# Altium PCB ErrorPCB.PcbDoc
Units mm, origin at the board's own origin, x right, y up, seen from the top; angles counter-clockwise.
Board outline 133.2 x 134 mm, 2 copper layers (Top Layer, Bottom Layer); 69 components, 47 nets, 197 pads, 4 vias.
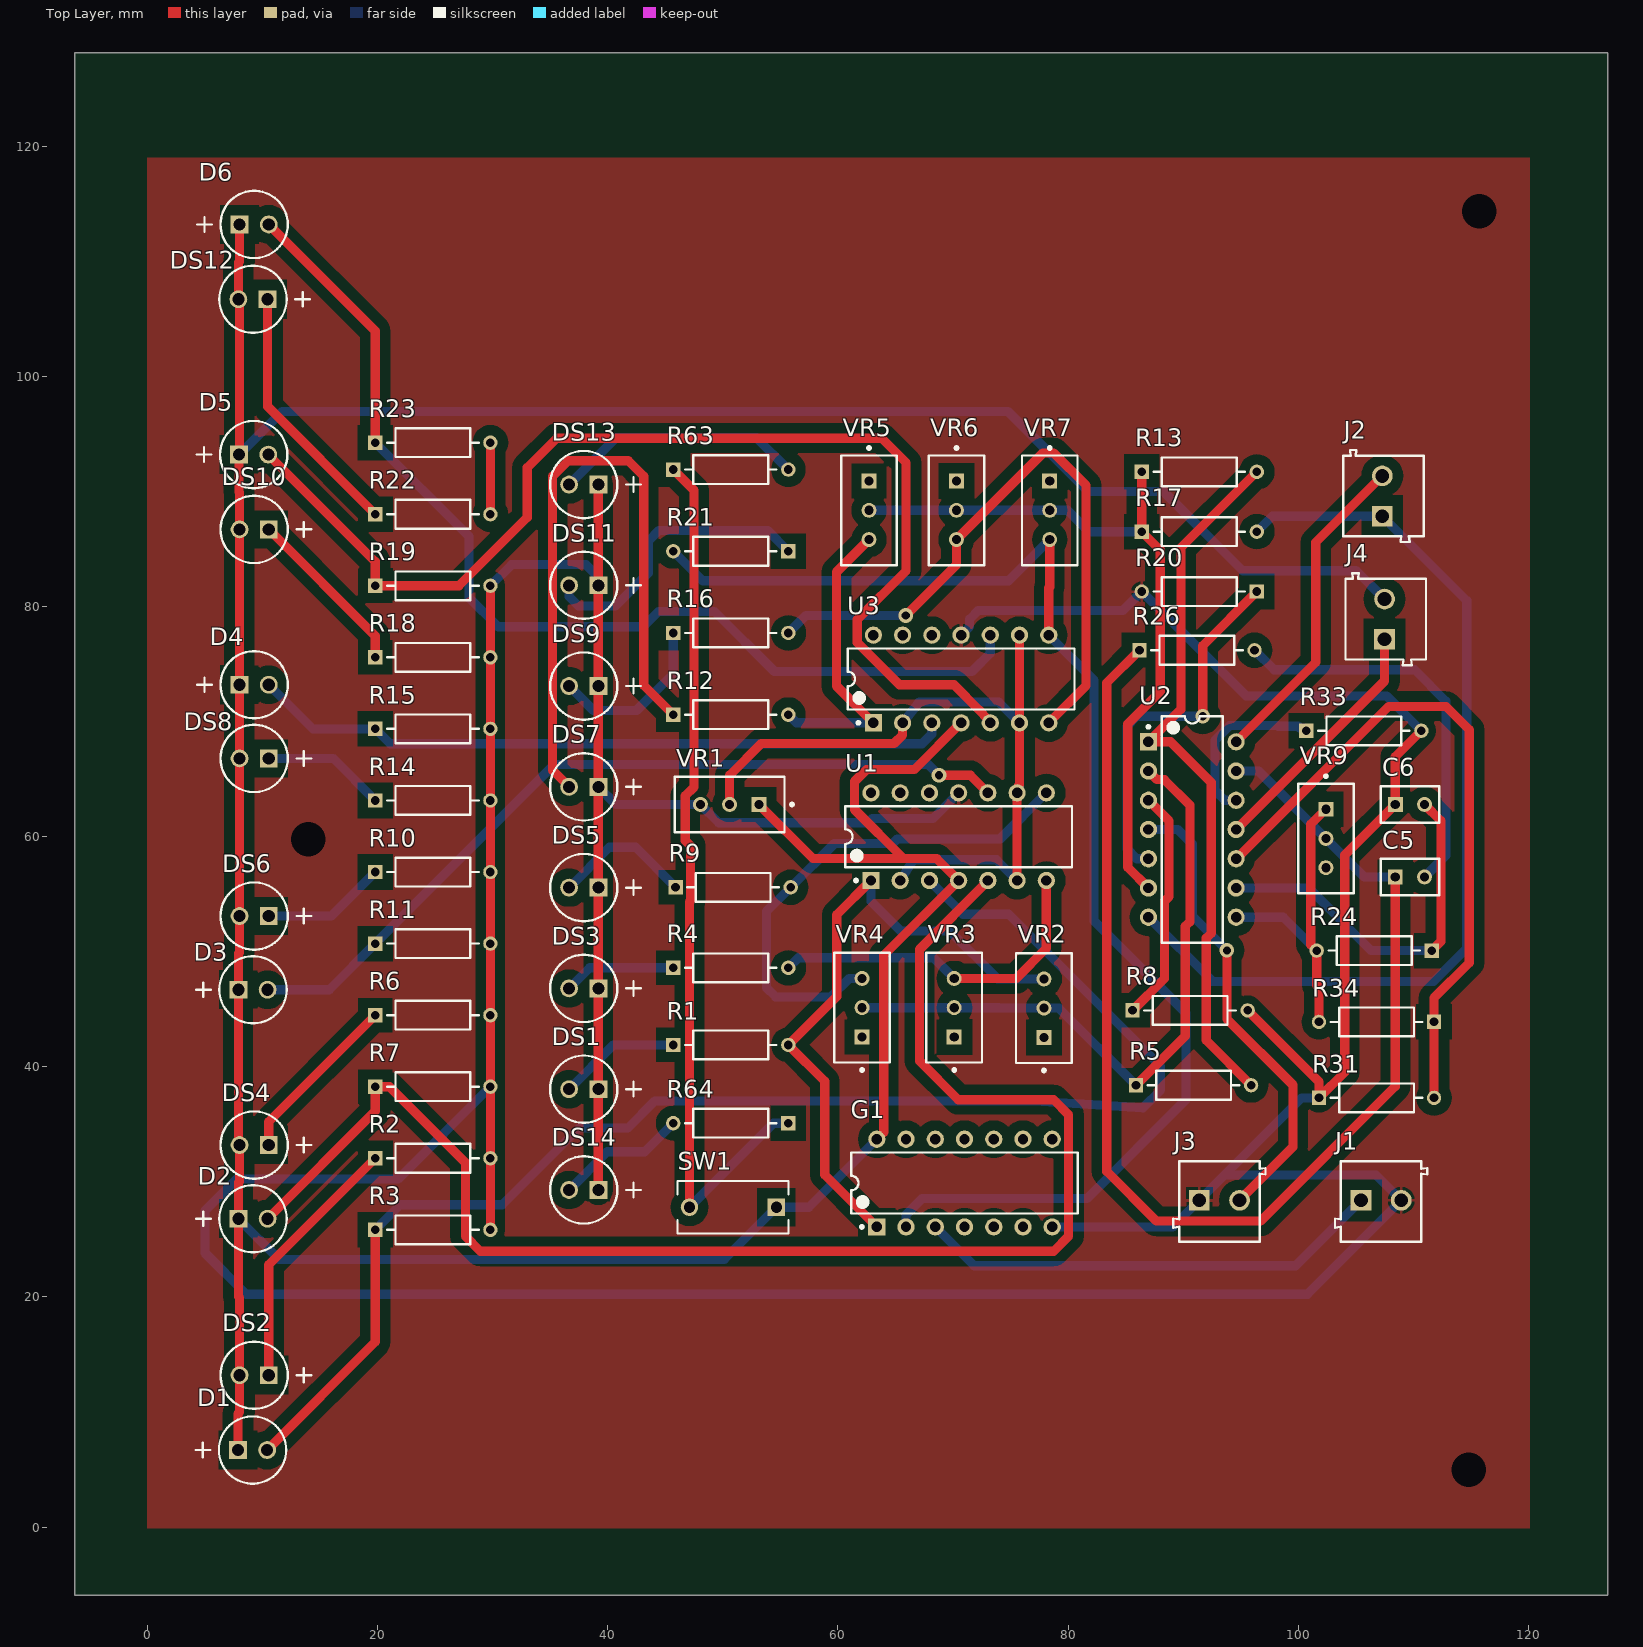
[diagram p0: Top Layer view]
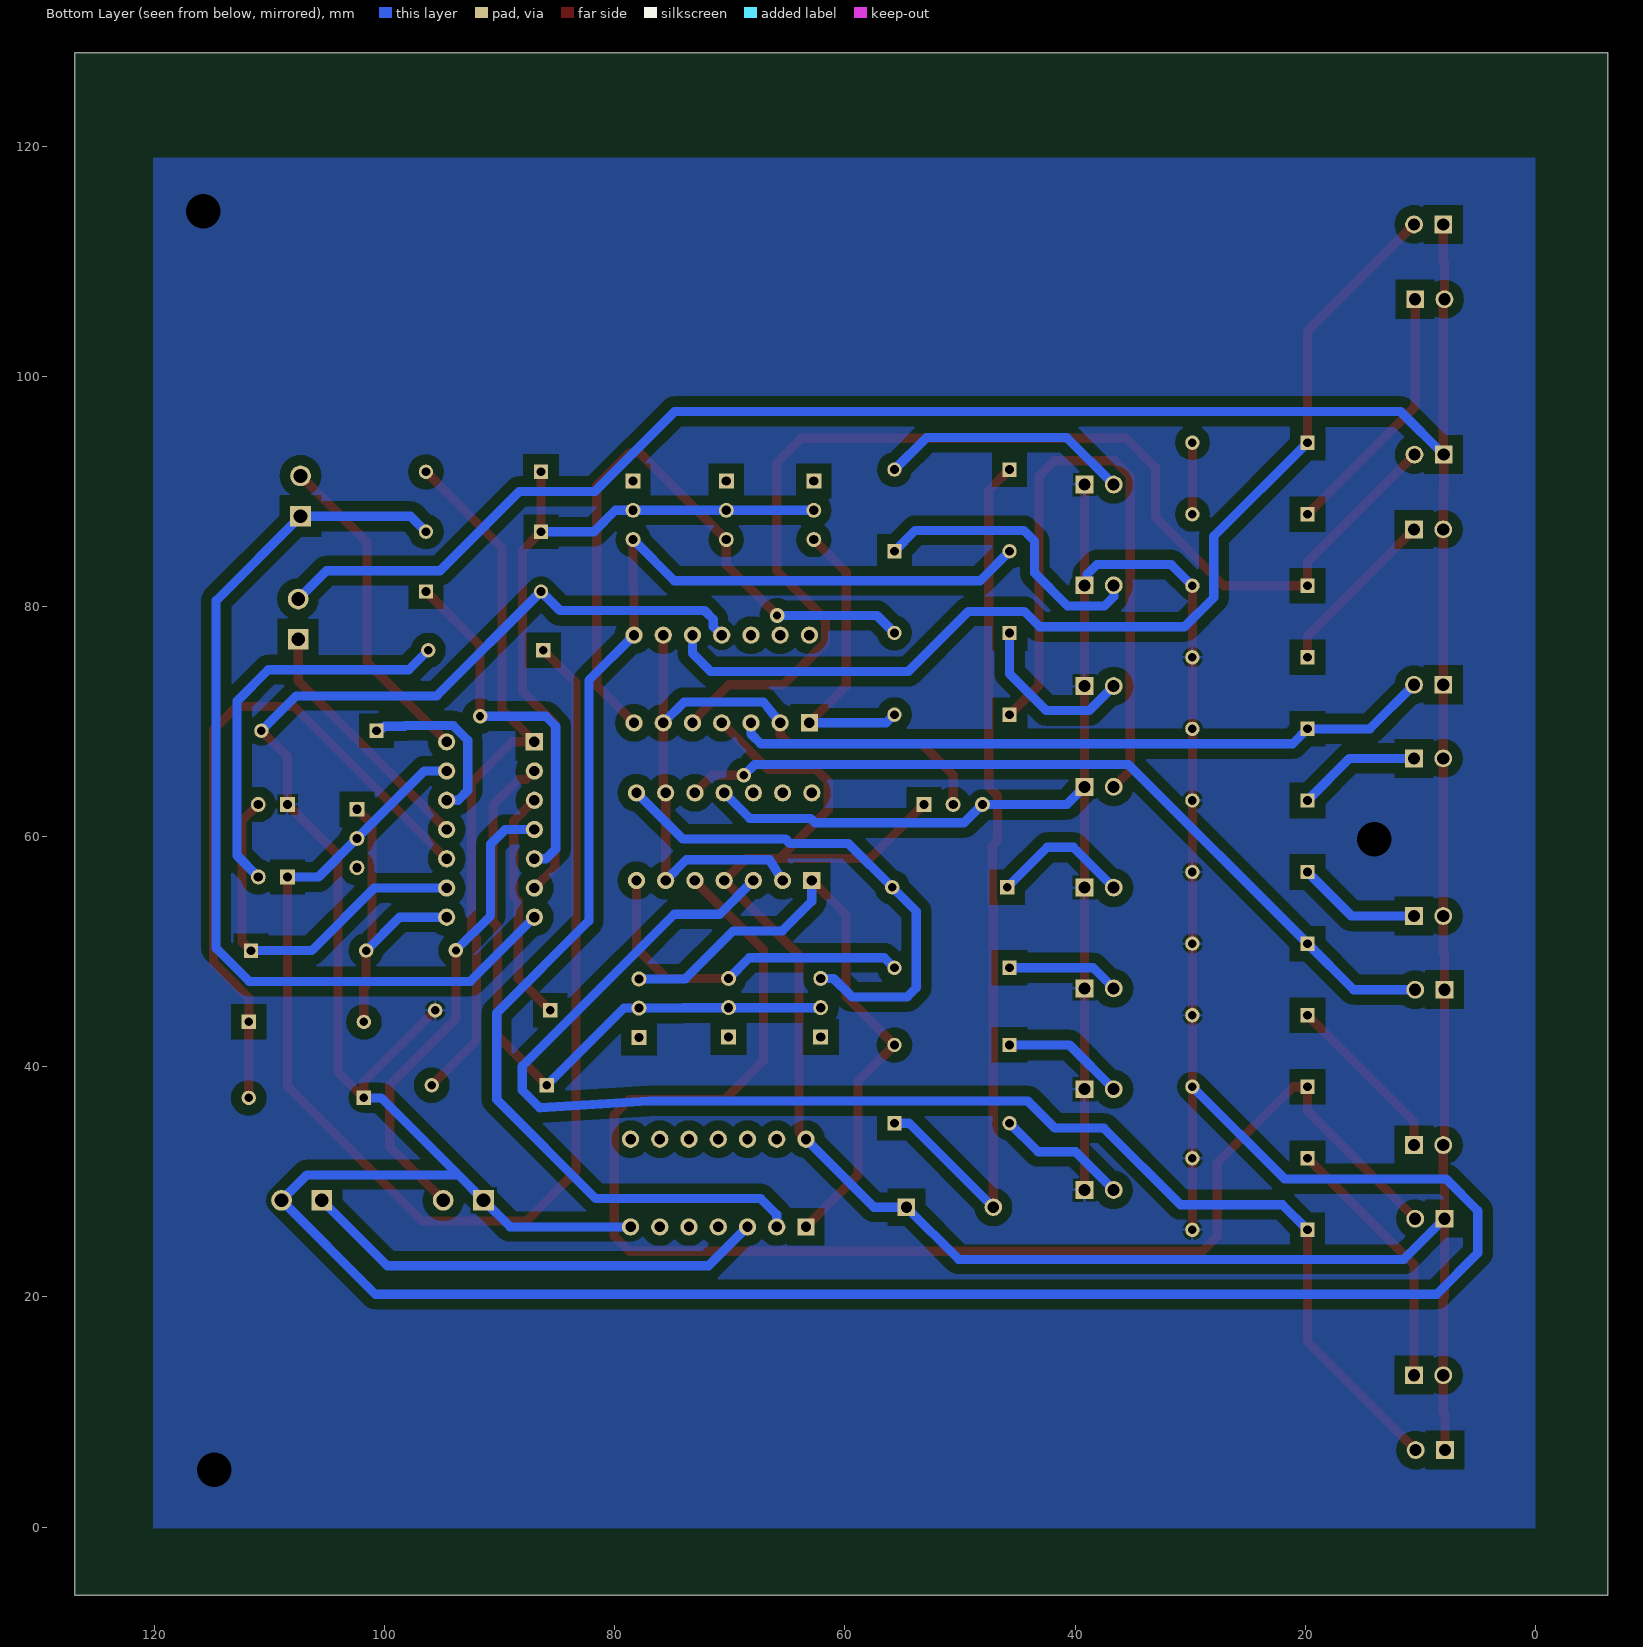
[diagram p1: Bottom Layer view, seen from below]
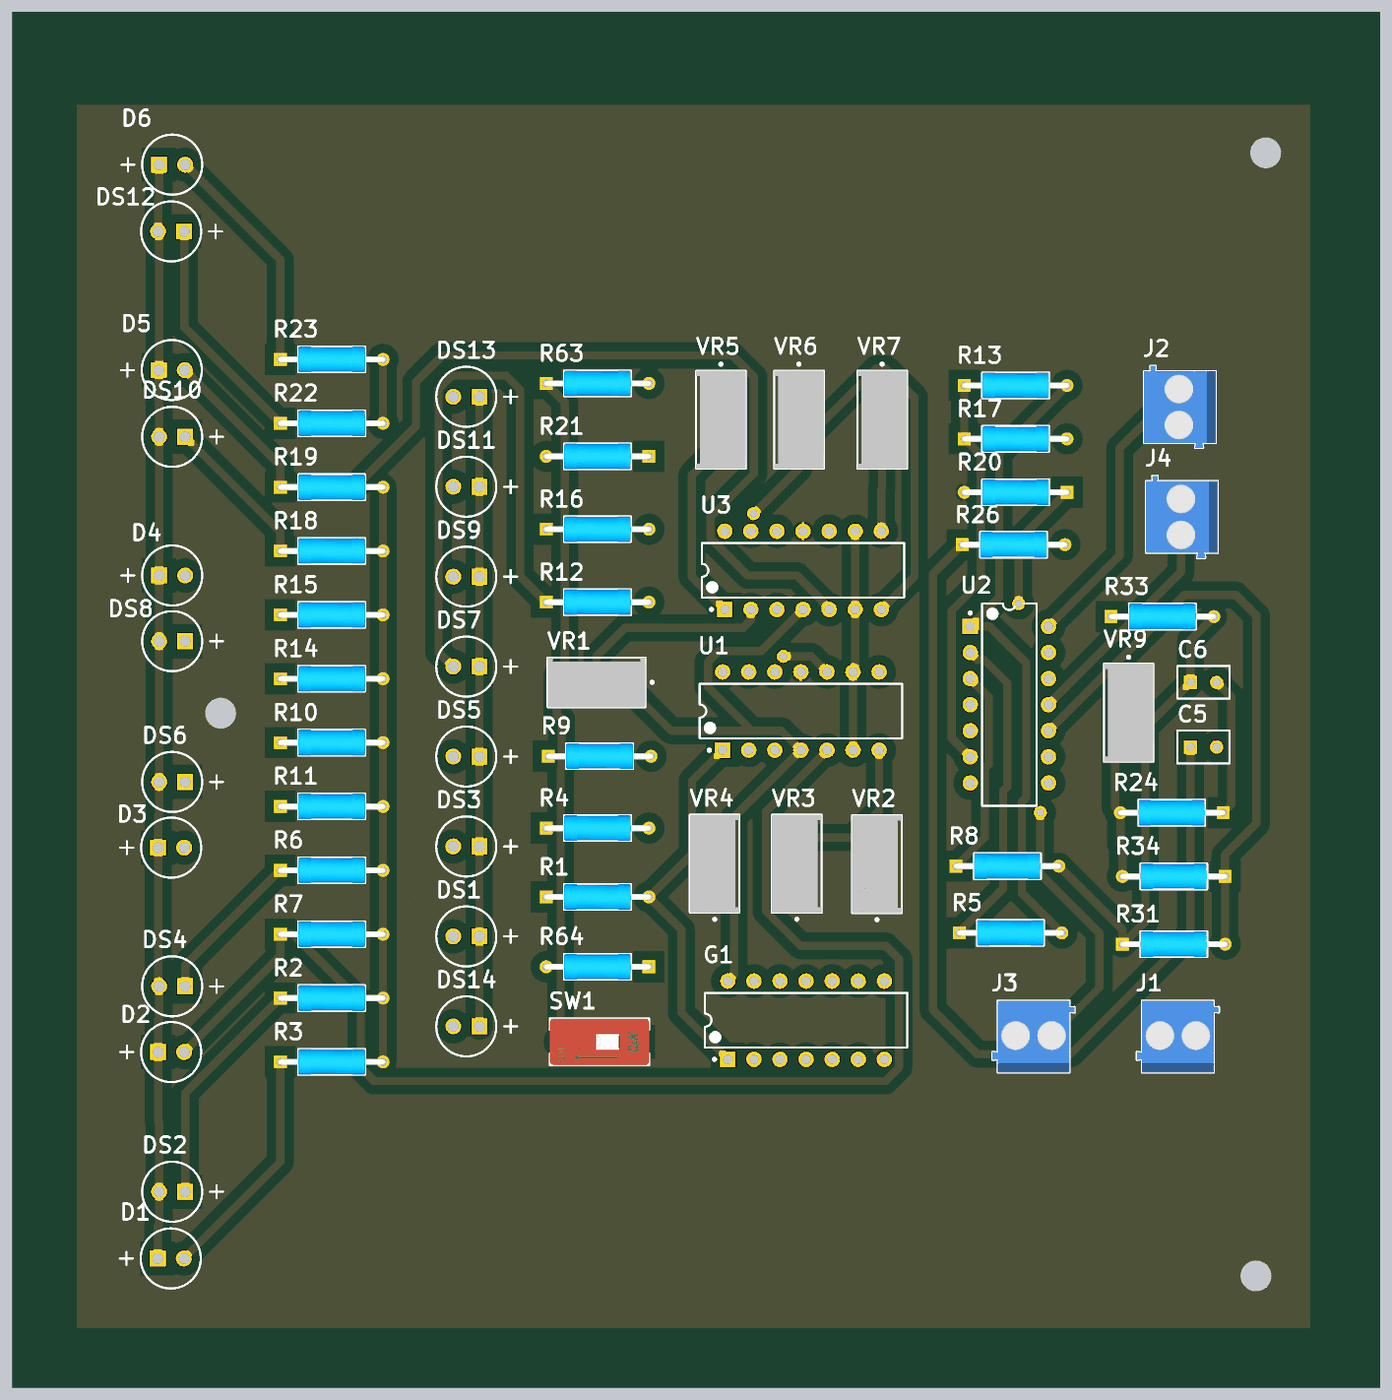
[diagram p2: 3D render of the assembled board from above, using the file's embedded part models]

## Layer stack, top to bottom
Top Solder: solder mask 0.0102, Solder Resist, Dk 3.5
Top Layer: signal copper 0.0356
Dielectric 1: dielectric 0.32, FR-4, Dk 4.8
Bottom Layer: signal copper 0.0356
Bottom Solder: solder mask 0.0102, Solder Resist, Dk 3.5

## Board outline
-6.3,-5.9 126.9,-5.9 126.9,128.1 -6.3,128.1

## Design rules (kind name [scope] priority, off if disabled: settings)
Clearance "Copper Pour" [InPolygon] p1: gap=0.9 ignorepadtopadclearanceinfootprint=FALSE
Clearance [All] p2: gap=0.254 ignorepadtopadclearanceinfootprint=FALSE except(0: Arc-Hole Track-Hole SMDPad-Hole THPad-Hole Via-Hole Fill-Hole Poly-Hole Region-Hole Text-Hole; 1: Arc-Arc Arc-Track Track-Track)
PolygonConnect [All] p1: connectstyle=Relief reliefconductorwidth=0.254 reliefentries=4 polygonreliefangle="90 Angle" airgapwidth=0.254
RoutingVias [All] p1: holewidth=0.711 width=1.27 viastyle="Through Hole" minholewidth=0.711 minwidth=1.27 maxholewidth=0.711 maxwidth=1.27
SolderMaskExpansion [All] p1: expansion=0.102 istentingtop=FALSE
Width Width_1 [All] p1: maxlimit=0.9 minlimit=0.8 preferedwidth=0.8 minimp=50.000000 maximp=50.000000 favimp=50.000000
Width [InNet('GND')] p2: maxlimit=1.8 minlimit=1.2 preferedwidth=1.5 minimp=50.000000 maximp=50.000000 favimp=50.000000
Width Width_3 [InNet('+9')] p3: maxlimit=1.8 minlimit=1.2 preferedwidth=1.5 minimp=50.000000 maximp=50.000000 favimp=50.000000
Width Width_2 [InNet('+5')] p4: maxlimit=1.8 minlimit=1.2 preferedwidth=1.5 minimp=50.000000 maximp=50.000000 favimp=50.000000
30 further rules are at their usual default settings.

## Components (designator, comment, footprint, x,y, rotation, side; value= is the part's Value field where it differs from the comment)
C5 "C320C104K5R5TA" CAPR51-254-508X318X736 109.7,56.5 r0 top value=0.1uF
C6 "C320C104K5R5TA" CAPR51-254-508X318X736 109.705,62.8 r0 top value=0.1uF
D1 "HLMP-3301" AVAG-HLMP-3301-2 7.86,6.7 r0 top
D2 "HLMP-3301" AVAG-HLMP-3301-2 7.9,26.8 r0 top
D3 "HLMP-3301" AVAG-HLMP-3301-2 7.9,46.7 r0 top
D4 "HLMP-3301" AVAG-HLMP-3301-2 8,73.2 r0 top
D5 "HLMP-3301" AVAG-HLMP-3301-2 7.96,93.2 r0 top
D6 "HLMP-3301" AVAG-HLMP-3301-2 8,113.2 r0 top
DS1 "HLMP-3301" AVAG-HLMP-3301-2 39.18,38.057 r180 top
DS2 "HLMP-3301" AVAG-HLMP-3301-2 10.54,13.2 r180 top
DS3 "HLMP-3301" AVAG-HLMP-3301-2 39.18,46.814 r180 top
DS4 "HLMP-3301" AVAG-HLMP-3301-2 10.54,33.2 r180 top
DS5 "HLMP-3301" AVAG-HLMP-3301-2 39.18,55.571 r180 top
DS6 "HLMP-3301" AVAG-HLMP-3301-2 10.54,53.1 r180 top
DS7 "HLMP-3301" AVAG-HLMP-3301-2 39.18,64.329 r180 top
DS8 "HLMP-3301" AVAG-HLMP-3301-2 10.54,66.8 r180 top
DS9 "HLMP-3301" AVAG-HLMP-3301-2 39.18,73.086 r180 top
DS10 "HLMP-3301" AVAG-HLMP-3301-2 10.54,86.7 r180 top
DS11 "HLMP-3301" AVAG-HLMP-3301-2 39.18,81.843 r180 top
DS12 "HLMP-3301" AVAG-HLMP-3301-2 10.44,106.7 r180 top
DS13 "HLMP-3301" AVAG-HLMP-3301-2 39.18,90.6 r180 top
DS14 "HLMP-3301" AVAG-HLMP-3301-2 39.18,29.3 r180 top
G1 "SN74HC08N" N0014A 71,29.9 r90 top
J1 "691103110002" 691103110002 107.2,28.3 r0 top
J2 "691103110002" 691103110002 107.4,89.6 r90 top
J3 "691103110002" 691103110002 93.15,28.3 r0 top
J4 "691103110002" 691103110002 107.6,78.9 r90 top
R1 "MRS25000C1101FCT00" FP-MRS25-MFG 50.689,41.9 r0 top value=1.1kΩ
R2 "MRS25000C1101FCT00" FP-MRS25-MFG 24.8,32.055 r0 top value=1.1kΩ
R3 "MRS25000C1101FCT00" FP-MRS25-MFG 24.8,25.837 r0 top value=1.1kΩ
R4 "MRS25000C1101FCT00" FP-MRS25-MFG 50.689,48.6 r0 top value=1.1kΩ
R5 "MRS25000C1101FCT00" FP-MRS25-MFG 90.9,38.4 r0 top value=1.1kΩ
R6 "MRS25000C1101FCT00" FP-MRS25-MFG 24.8,44.491 r0 top value=1.1kΩ
R7 "MRS25000C1101FCT00" FP-MRS25-MFG 24.8,38.273 r0 top value=1.1kΩ
R8 "MRS25000C1101FCT00" FP-MRS25-MFG 90.6,44.9 r0 top value=1.1kΩ
R9 "MRS25000C1101FCT00" FP-MRS25-MFG 50.889,55.6 r0 top value=1.1kΩ
R10 "MRS25000C1101FCT00" FP-MRS25-MFG 24.8,56.928 r0 top value=1.1kΩ
R11 "MRS25000C1101FCT00" FP-MRS25-MFG 24.8,50.709 r0 top value=1.1kΩ
R12 "MRS25000C1101FCT00" FP-MRS25-MFG 50.689,70.6 r0 top value=1.1kΩ
R13 "MRS25000C1101FCT00" FP-MRS25-MFG 91.4,91.7 r0 top value=1.1kΩ
R14 "MRS25000C1101FCT00" FP-MRS25-MFG 24.8,63.146 r0 top value=1.1kΩ
R15 "MRS25000C1101FCT00" FP-MRS25-MFG 24.8,69.364 r0 top value=1.1kΩ
R16 "MRS25000C1101FCT00" FP-MRS25-MFG 50.689,77.7 r0 top value=1.1kΩ
R17 "MRS25000C1101FCT00" FP-MRS25-MFG 91.4,86.5 r0 top value=1.1kΩ
R18 "MRS25000C1101FCT00" FP-MRS25-MFG 24.8,75.582 r0 top value=1.1kΩ
R19 "MRS25000C1101FCT00" FP-MRS25-MFG 24.8,81.8 r0 top value=1.1kΩ
R20 "MRS25000C1101FCT00" FP-MRS25-MFG 91.4,81.3 r180 top value=1.1kΩ
R21 "MRS25000C1101FCT00" FP-MRS25-MFG 50.689,84.8 r180 top value=1.1kΩ
R22 "MRS25000C1101FCT00" FP-MRS25-MFG 24.8,88.018 r0 top value=1.1kΩ
R23 "MRS25000C1101FCT00" FP-MRS25-MFG 24.8,94.237 r0 top value=1.1kΩ
R24 "MRS25000C1101FCT00" FP-MRS25-MFG 106.6,50.1 r180 top value=1.1kΩ
R26 "MRS25000C1101FCT00" FP-MRS25-MFG 91.2,76.2 r0 top value=1.1kΩ
R31 "MRS25000C1101FCT00" FP-MRS25-MFG 106.8,37.3 r0 top value=1.1kΩ
R33 "MRS25000C1101FCT00" FP-MRS25-MFG 105.7,69.2 r0 top value=1.1kΩ
R34 "MRS25000C1101FCT00" FP-MRS25-MFG 106.8,43.9 r180 top value=1.1kΩ
R63 "MRS25000C1101FCT00" FP-MRS25-MFG 50.689,91.9 r0 top value=1.1kΩ
R64 "MRS25000C1101FCT00" FP-MRS25-MFG 50.689,35.1 r180 top value=1.1kΩ
SW1 "BD01" FP-BD01-MFG 50.875,27.8 r90 top
U1 "LM324N" N0014A 70.489,60 r90 top
U2 "LM324N" N0014A 90.79,60.62 r0 top
U3 "LM324N" N0014A 70.7,73.7 r90 top
VR1 "3296W-1-103LF" BOUR-3296W 50.589,62.8 r180 top
VR2 "3296W-1-103LF" BOUR-3296W 77.9,45.1 r90 top
VR3 "3296W-1-103LF" BOUR-3296W 70.1,45.14 r90 top
VR4 "3296W-1-103LF" BOUR-3296W 62.1,45.14 r90 top
VR5 "3296W-1-103LF" BOUR-3296W 62.7,88.36 r270 top
VR6 "3296W-1-103LF" BOUR-3296W 70.3,88.36 r270 top
VR7 "3296W-1-103LF" BOUR-3296W 78.4,88.36 r270 top
VR9 "3296W-1-103LF" BOUR-3296W 102.4,59.84 r270 top

## Footprints (in the part's own frame and the unit in brackets; to place one, negate y for a bottom-side part, rotate by r counter-clockwise, add the part's x,y. Pads: shape width x height; smd on the part's side, far side on the other; paste and mask are expansions set on the pad)
691103110002 [mm] "3,50mm - modular - blue - Horizontal wire entry - Pressure clamp - 8,4mm height - 02p"
  rect 1.8x1.8 hole 1.2: 1(-1.75,0.1)
  round 1.8 hole 1.2: 2(1.75,0.1)
  silkscreen extent -4,-3.5 4,3.5, body extent -4,-3.5 4,3.5, height 8.45
AVAG-HLMP-3301-2 [mm] "THD, 2-Leads, Body Dia 5.85mm"
  rect 1.55x1.55 hole 1.05: 1(0,0)
  round 1.55 hole 1.05: 2(2.54,0)
  silkscreen extent -3.68,-2.92 4.19,2.92
BOUR-3296W [mm] "THD, 3-Leads, Body 9.53x4.83mm, Pitch 2.54mm"
  rect 1.3x1.3 hole 0.8: 1(-2.54,0)
  round 1.3 hole 0.8: 2(0,0) 3(2.54,0)
  silkscreen extent -5.54,-2.41 4.77,2.42, body extent -4.76,-2.4 4.76,2.42, height 11.55
CAPR51-254-508X318X736 [mm] "THD, 2-Leads, Body 5.08x3.18mm"
  rect 1.3x1.3 hole 0.8: 1(-1.27,0)
  round 1.3 hole 0.8: 2(1.27,0)
  silkscreen extent -2.54,-1.59 2.54,1.59, body extent -2.54,-1.59 2.54,1.59, height 7.36
FP-BD01-MFG [mm]
  rect 1.52x1.52 hole 0.97 paste-1000 mask+0: 1(0,-3.775)
  round 1.52 hole 0.97 paste-1000 mask+0: 2(0,3.775)
  silkscreen extent -2.29,-4.82 2.29,4.83, body extent -2.38,-4.92 2.38,4.92, height 0.25
FP-MRS25-MFG [mm]
  rect 1.25x1.25 hole 0.75 paste-1000 mask+0: 1(-5,0)
  round 1.25 hole 0.75 paste-1000 mask+0: 2(5,0)
  silkscreen extent -3.98,-1.25 3.98,1.25, body extent -5.72,-1.35 5.72,1.35, height 0.25
N0014A [mm] "DIP, 14-Leads, Body 19.7x6.6mm, Pitch 2.54mm"
  rect 1.5x1.5 hole 0.9: 1(-3.81,7.62)
  round 1.5 hole 0.9: 2(-3.81,5.08) 3(-3.81,2.54) 4(-3.81,0) 5(-3.81,-2.54) 6(-3.81,-5.08) 7(-3.81,-7.62) 8(3.81,-7.62) 9(3.81,-5.08) 10(3.81,-2.54) 11(3.81,0) 12(3.81,2.54) 13(3.81,5.08) 14(3.81,7.62)
  silkscreen extent -3.93,-9.85 2.65,9.85, body extent -3.95,-9.85 3.95,9.85, height 5.08

## Part data
C5 C6: library part CMP-1664-00004-1, "Radial Leaded Multilayer Ceramic Capacitor, 0.1 uF, +/- 10%, 50 V, -55 to 125 degC, 2-Pin THD, RoHS, Tape and Reel", Case\Package=SOT-23-5, Dropout Voltage="260 mV", Max Input Voltage="8 V", Max Operating Temperature="85 degC", Max Power Dissipation="250 mW", Min Operating Temperature="-40 degC", Output Current="150 mA", Output Voltage="5 V", Package Quantity=3000, ComponentLink1Description="Manufacturer URL", ComponentLink1URL=http://www.kemet.com/, ComponentLink2Description=Datasheet, ComponentLink2URL=http://www.kemet.com/docfinder?Partnumber=C320C104K5R5TA, DatasheetVersion=Dec-15, Height="1.3 mm", Length="3 mm", Mount="Surface Mount", Outputs=1, PackageDescription="2-Pin Through Hole Device, Body 5.08 x 3.18 mm, Pitch 2.54 mm", PackageReference=CAPR51-254-508X318X736, Packaging="Tape and Reel", Pins=5, Radiation Hardening=No, RoHSCompliant=true, Width="1.8 mm"
D1 D2 D3 D4 D5 D6 DS1 DS2 DS3 DS4 DS5 DS6 DS7 DS8 DS9 DS10 DS11 DS12 DS13 DS14: library part CMP-2000-06411-1, "T-1 3/4 (5 mm) Diffused LED Lamp, 1.9 V, -40 to 100 degC, 2-Pin THD, RoHS, Bulk", Emitting Color=Red, Forward Current=25mA, Forward Voltage=2.4V, Manufacturer=Avago, Operating Temp Range=-40Cto100C, Operating Temperature Classification=Industrial, Package Description="2-Pin Through Hole LED, Dia 5.85 mm", Package Type=T-13/4, Power Dissipation=85W, Reverse Voltage=5V, Test Current (It)=10mA, Chip Material=GaP, Datasheet URL=http://www.avagotech.com/docs/AV02-1558EN, Datasheet Version=03/2015, DELETED=Compliant, Dominant Wave Length=626nm, High Brightness=No, Lens Dimensions=5.08x5.08x8.3mm, Lens Type=ColoredDiffused, Lum Intensity=5.4mcd, Luminous Intensity=5.4mcd, Main Category=StandardLED, Manufacturer URL=http://www.avagotech.com/, Mounting=ThroughHole, Mounting Technology=ThroughHole, Number of  Elements=1, Package Reference=HLMP-3301, Packaging=TapeandReel, Peak Wavelength=635nm, Pin Count=2, Product Depth (mm)=6.1mm, Product Height (mm)=9.19mm, Product Length (mm)=6.1mm, Rad Hardened=No, Shape Type=Circular, Type=Uni-Color, Viewing Angle=60deg
G1: library part CMP-0777-00250-3, "Quadruple 2-Input Positive-AND Gates, N0014A, TUBE", F @ Nom Voltage(Max)(Mhz)=70, Generic Part Number=SN74HC08, ICC @ Nom Voltage(Max)(mA)=0.02, Manufacturer="Texas Instruments", Operating Temperature Range(C)="-40 to 85", Rating=Catalog, tpd @ Nom Voltage(Max)(ns)=28, Voltage(Nom)(V)=5, Bits(#)=4, DatasheetVersion=SCLS081F, Input Type=CMOS, Output Type=CMOS, PackageReference=N0014A, Schmitt Trigger=No, Technology Family=HC, VCC(Max)(V)=6, VCC(Min)(V)=2
J1 J2 J3 J4: library part CMP-1502-03254-1, "Series 1031 - 3.50 mm Horizontal Entry Modular with Pressure Clamp WR-TBL, 2 pin", Manufacturer="Wurth Elektronik", Operating Temperature=-40to105degC, Datasheet URL=http://katalog.we-online.de/em/datasheet/6911031100xx.pdf, Manufacturer URL=http://www.we-online.de, Mounting Technology=THT, Package Reference=691103110002, Packaging=Box, Part Number=691103110002, Pin Number=2, Pitch=3.50mm, Publisher=WurthElektronik
R1 R2 R4 R6 R9 R10 R12 R14 R16 R18 R21 R22: library part CMP-02408-000003-1, "RES 1.1K OHM 0.6W 1% AXIAL", Manufacturer="Vishay BC Components", Package=MRS25, Power Rating=0.6W, Resistance=220Ω, Temperature="-55°C to +155°C", Temperature Coefficient=50ppm/°C, Temperature Range High=+155°C, Temperature Range Low=-55°C, Tolerance=1%, Voltage Rating=350V, Automotive=No, Category=Res, ComponentLink2Description=Datasheet, ComponentLink2URL=http://www.vishay.com/docs/28724/mrs16m25.pdf, Composition="Thin Film", Device Class L1="Passive Components", Device Class L2=Resistors, Device Class L3="Through-Hole Resistors", Digikey Description="RES 1.1K OHM 0.6W 1% AXIAL", Height=2.5mm, Ipc Land Pattern Name=RESAD1000W75L650D250, Lead Free=Yes, Manufacturer Part Number=MRS25000C1101FCT00, Mouser Description="Thin Film Resistors .6watt 1.1Kohms 1%", Octopart=https://octopart.com/mrs25000c1101fct00-vishay-43740214, RoHS=TRUE, Series=MRS25
R3 R5 R7 R8 R11 R13 R15 R17 R19 R20 R23 R24 R31 R33 R34: library part CMP-02408-000003-1, "RES 1.1K OHM 0.6W 1% AXIAL", Manufacturer="Vishay BC Components", Package=MRS25, Power Rating=0.6W, Resistance=10kΩ, Temperature="-55°C to +155°C", Temperature Coefficient=50ppm/°C, Temperature Range High=+155°C, Temperature Range Low=-55°C, Tolerance=1%, Voltage Rating=350V, Automotive=No, Category=Res, ComponentLink2Description=Datasheet, ComponentLink2URL=http://www.vishay.com/docs/28724/mrs16m25.pdf, Composition="Thin Film", Device Class L1="Passive Components", Device Class L2=Resistors, Device Class L3="Through-Hole Resistors", Digikey Description="RES 1.1K OHM 0.6W 1% AXIAL", Height=2.5mm, Ipc Land Pattern Name=RESAD1000W75L650D250, Lead Free=Yes, Manufacturer Part Number=MRS25000C1101FCT00, Mouser Description="Thin Film Resistors .6watt 1.1Kohms 1%", Octopart=https://octopart.com/mrs25000c1101fct00-vishay-43740214, RoHS=TRUE, Series=MRS25
R26: library part CMP-02408-000003-1, "RES 1.1K OHM 0.6W 1% AXIAL", Manufacturer="Vishay BC Components", Package=MRS25, Power Rating=0.6W, Resistance=47kΩ, Temperature="-55°C to +155°C", Temperature Coefficient=50ppm/°C, Temperature Range High=+155°C, Temperature Range Low=-55°C, Tolerance=1%, Voltage Rating=350V, Automotive=No, Category=Res, ComponentLink2Description=Datasheet, ComponentLink2URL=http://www.vishay.com/docs/28724/mrs16m25.pdf, Composition="Thin Film", Device Class L1="Passive Components", Device Class L2=Resistors, Device Class L3="Through-Hole Resistors", Digikey Description="RES 1.1K OHM 0.6W 1% AXIAL", Height=2.5mm, Ipc Land Pattern Name=RESAD1000W75L650D250, Lead Free=Yes, Manufacturer Part Number=MRS25000C1101FCT00, Mouser Description="Thin Film Resistors .6watt 1.1Kohms 1%", Octopart=https://octopart.com/mrs25000c1101fct00-vishay-43740214, RoHS=TRUE, Series=MRS25
R63 R64: library part CMP-02408-000003-1, "RES 1.1K OHM 0.6W 1% AXIAL", Manufacturer="Vishay BC Components", Package=MRS25, Power Rating=0.6W, Resistance=330Ω, Temperature="-55°C to +155°C", Temperature Coefficient=50ppm/°C, Temperature Range High=+155°C, Temperature Range Low=-55°C, Tolerance=1%, Voltage Rating=350V, Automotive=No, Category=Res, ComponentLink2Description=Datasheet, ComponentLink2URL=http://www.vishay.com/docs/28724/mrs16m25.pdf, Composition="Thin Film", Device Class L1="Passive Components", Device Class L2=Resistors, Device Class L3="Through-Hole Resistors", Digikey Description="RES 1.1K OHM 0.6W 1% AXIAL", Height=2.5mm, Ipc Land Pattern Name=RESAD1000W75L650D250, Lead Free=Yes, Manufacturer Part Number=MRS25000C1101FCT00, Mouser Description="Thin Film Resistors .6watt 1.1Kohms 1%", Octopart=https://octopart.com/mrs25000c1101fct00-vishay-43740214, RoHS=TRUE, Series=MRS25
SW1: library part CMP-10033-000004-1, "SWITCH SLIDE DIP SPST 100MA 5V", Capacitance=5pF, Case/Package=DIP, Contact Current Rating=25mA, Current Rating=100mA, Max Operating Temperature=85°C, Max Voltage Rating (DC)=25V, Min Operating Temperature=-40°C, Package Quantity=115, Voltage Rating (DC)=5V, Actuator Length=0.9mm, Actuator Material=Nylon, Actuator Type="Slide (Standard)", Approvals=UL, Body Material=PBT, Contact Material=Bronze, Contact Plating=Gold, Depth=9.65mm, Electrical Life=10000Cycles, Lead Free="Lead Free", Length=0.18inch, Life (Cycles)=10000Cycles, Material=Nylon, Max Current Rating=100mA, Mechanical Life=10000Cycles, Mount="Through Hole", Number of Circuits=1, Number of Poles=1, Number of Positions=1, Orientation=Straight, Packaging=Rail/Tube, Pitch=0.1inch, Radiation Hardening=No, REACH SVHC="No SVHC", RoHS Compliant=Yes, Series=BD, Terminal Pitch=2.54mm, Termination="PC Pin", Throw Configuration=SPST, Washable=Yes, Width=9.65mm
U1 U2 U3: library part CMP-0055-00082-3, "Low Power Quad Operational Amplifier, 14-pin MDIP", Manufacturer="Texas Instruments", Package Reference=N0014A, PackageTopMarking=NSUZXYYTTE#*LM324N, PowerWise=N, Code_JEDEC=MS-001-AA, ComponentLink1Description="Datasheet URL", ComponentLink1URL=http://www.ti.com/general/docs/lit/getliterature.tsp?genericPartNumber=LM324&fileType=pdf, CompType=Amplifiers, PackageDescription="MDIP, .750 x .250 x.130in, 14 Lead, .100in Pitch", PinCount=14, RoHS=N
VR1 VR2 VR7: library part CMP-1747-00001-1, "Square Trimpot(R) Trimming Potentiometer, 10 KOhm, +/- 10%, 0.5 W, -55 to 125 degC, 3-Pin THD, RoHS, Tube", Case Code (Imperial)=0603, Case Code (Metric)=1608, Max Operating Temperature="155 degC", Min Operating Temperature="-55 degC", Package Quantity=5000, Power Rating="100 mW", Resistance=20k, Tolerance=1%, Type (Resistor)="Thick Film", Voltage Rating="75 V", Case\Package=0603, ComponentLink1Description="Manufacturer URL", ComponentLink1URL=http://www.bourns.com/, ComponentLink2Description=Datasheet, ComponentLink2URL=http://www.bourns.com/docs/Product-Datasheets/3296.pdf, DatasheetVersion=May-16, Height="0.45 mm", Length="1.55 mm", Mount="Surface Mount", PackageDescription="3-Pin Through Hole Device, Body 9.53 x 4.83 mm, Pitch 2.54 mm", PackageReference=3296W, Packaging="Tape and Reel", Pins=2, Radiation Hardening=No, REACH SVHC=Unknown, RoHSCompliant=true, Weight="7.1E-05 oz", Width="0.85 mm"
VR3: library part CMP-1747-00001-1, "Square Trimpot(R) Trimming Potentiometer, 10 KOhm, +/- 10%, 0.5 W, -55 to 125 degC, 3-Pin THD, RoHS, Tube", Case Code (Imperial)=0603, Case Code (Metric)=1608, Max Operating Temperature="155 degC", Min Operating Temperature="-55 degC", Package Quantity=5000, Power Rating="100 mW", Resistance="`30 k", Tolerance=1%, Type (Resistor)="Thick Film", Voltage Rating="75 V", Case\Package=0603, ComponentLink1Description="Manufacturer URL", ComponentLink1URL=http://www.bourns.com/, ComponentLink2Description=Datasheet, ComponentLink2URL=http://www.bourns.com/docs/Product-Datasheets/3296.pdf, DatasheetVersion=May-16, Height="0.45 mm", Length="1.55 mm", Mount="Surface Mount", PackageDescription="3-Pin Through Hole Device, Body 9.53 x 4.83 mm, Pitch 2.54 mm", PackageReference=3296W, Packaging="Tape and Reel", Pins=2, Radiation Hardening=No, REACH SVHC=Unknown, RoHSCompliant=true, Weight="7.1E-05 oz", Width="0.85 mm"
VR4 VR5: library part CMP-1747-00001-1, "Square Trimpot(R) Trimming Potentiometer, 10 KOhm, +/- 10%, 0.5 W, -55 to 125 degC, 3-Pin THD, RoHS, Tube", Case Code (Imperial)=0603, Case Code (Metric)=1608, Max Operating Temperature="155 degC", Min Operating Temperature="-55 degC", Package Quantity=5000, Power Rating="100 mW", Resistance=40k, Tolerance=1%, Type (Resistor)="Thick Film", Voltage Rating="75 V", Case\Package=0603, ComponentLink1Description="Manufacturer URL", ComponentLink1URL=http://www.bourns.com/, ComponentLink2Description=Datasheet, ComponentLink2URL=http://www.bourns.com/docs/Product-Datasheets/3296.pdf, DatasheetVersion=May-16, Height="0.45 mm", Length="1.55 mm", Mount="Surface Mount", PackageDescription="3-Pin Through Hole Device, Body 9.53 x 4.83 mm, Pitch 2.54 mm", PackageReference=3296W, Packaging="Tape and Reel", Pins=2, Radiation Hardening=No, REACH SVHC=Unknown, RoHSCompliant=true, Weight="7.1E-05 oz", Width="0.85 mm"
VR6: library part CMP-1747-00001-1, "Square Trimpot(R) Trimming Potentiometer, 10 KOhm, +/- 10%, 0.5 W, -55 to 125 degC, 3-Pin THD, RoHS, Tube", Case Code (Imperial)=0603, Case Code (Metric)=1608, Max Operating Temperature="155 degC", Min Operating Temperature="-55 degC", Package Quantity=5000, Power Rating="100 mW", Resistance=30k, Tolerance=1%, Type (Resistor)="Thick Film", Voltage Rating="75 V", Case\Package=0603, ComponentLink1Description="Manufacturer URL", ComponentLink1URL=http://www.bourns.com/, ComponentLink2Description=Datasheet, ComponentLink2URL=http://www.bourns.com/docs/Product-Datasheets/3296.pdf, DatasheetVersion=May-16, Height="0.45 mm", Length="1.55 mm", Mount="Surface Mount", PackageDescription="3-Pin Through Hole Device, Body 9.53 x 4.83 mm, Pitch 2.54 mm", PackageReference=3296W, Packaging="Tape and Reel", Pins=2, Radiation Hardening=No, REACH SVHC=Unknown, RoHSCompliant=true, Weight="7.1E-05 oz", Width="0.85 mm"
VR9: library part CMP-1747-00001-1, "Square Trimpot(R) Trimming Potentiometer, 10 KOhm, +/- 10%, 0.5 W, -55 to 125 degC, 3-Pin THD, RoHS, Tube", Case Code (Imperial)=0603, Case Code (Metric)=1608, Max Operating Temperature="155 degC", Min Operating Temperature="-55 degC", Package Quantity=5000, Power Rating="100 mW", Resistance=10k, Tolerance=1%, Type (Resistor)="Thick Film", Voltage Rating="75 V", Case\Package=0603, ComponentLink1Description="Manufacturer URL", ComponentLink1URL=http://www.bourns.com/, ComponentLink2Description=Datasheet, ComponentLink2URL=http://www.bourns.com/docs/Product-Datasheets/3296.pdf, DatasheetVersion=May-16, Height="0.45 mm", Length="1.55 mm", Mount="Surface Mount", PackageDescription="3-Pin Through Hole Device, Body 9.53 x 4.83 mm, Pitch 2.54 mm", PackageReference=3296W, Packaging="Tape and Reel", Pins=2, Radiation Hardening=No, REACH SVHC=Unknown, RoHSCompliant=true, Weight="7.1E-05 oz", Width="0.85 mm"

## Free pads (board coordinates)
  round 1.524 hole 3: 1(13.989,59.789) 1(115.748,114.349) 2(114.8,5)

## Via types
v1: diameter 1.27, hole 0.711, Top Layer to Bottom Layer, 4 vias

## Nets (pads, with @x,y where several pads share a name; then routed paths per layer and width w, separated by ;. In a path a pad name is that pad's centre, name@x,y a point inside that pad or via, vN(x,y) a via of type N, cw(c..) or ccw(c..) an arc to the next point about the centre after c; other vN are vias at no path point)
+5: D1.1 D2.1 D3.1 D4.1 D5.1 D6.1 DS2.2 DS4.2 DS6.2 DS8.2 DS10.2 DS12.2 G1.14 J4.2 SW1.1 U1.4 U3.4 VR1.1 | length 341.3
  Top Layer w0.8: D1.1 7.86,9.855 8,9.995 DS2.2 8,19.939 7.9,20.039 D2.1 7.9,29.947 8,30.047 DS4.2 7.9,33.3 D3.1 7.9,49.835 8,49.935 DS6.2 DS8.2 D4.1 DS10.2 8,89.916 7.96,89.956 D5.1 8,93.24 8,106.6 DS12.2 7.9,109.88 8,109.98 D6.1 ; VR1.1 57.839,58.09 65.71,58.09 ; G1.14 63.983,34.313 63.983,49.684 U1.4 68.589,58.09 65.71,58.09 ; U3.4 66.639,65.829 62.476,65.829 61.443,64.795 61.443,62.357 65.71,58.09
  Bottom Layer w0.8: D2.1 11.434,23.266 50.116,23.266 SW1.1 57.47,27.8 G1.14 ; D5.1 11.712,96.952 74.778,96.952 81.737,89.992 88.29,89.992 95.174,83.109 105.041,83.109 J4.2
+9: J3.2 U2.4 | length 40.8
  Top Layer w0.8: v1(93.8,50.116) 93.8,44.154 99.541,38.414 99.541,33.041 J3.2
  Bottom Layer w0.8: U2.4 89.519,60.62 90.78,59.36 90.78,53.137 v1(93.8,50.116)
-9: J4.1 U2.11 | length 21.9
  Top Layer w0.8: U2.11 107.5,73.52 J4.1
GND: C6.1 DS1.1 DS3.1 DS5.1 DS7.1 DS9.1 DS11.1 DS13.1 DS14.1 G1.7 J1.2 J3.1 pad.1 pad.2 R2.2 R3.2 R6.2 R7.2 R8.2 R10.2 R11.2 R14.2 R15.2 R18.2 R19.2 R20.2 R31.1 R33.2 U1.11 U3.11 VR1.3 | length 440.8
  Top Layer w0.8: R3.2 R2.2 R7.2 R6.2 R11.2 R10.2 R14.2 R15.2 R18.2 R19.2 ; DS14.1 DS1.1 DS3.1 DS5.1 DS7.1 DS9.1 DS11.1 DS13.1 ; R8.2 101.8,38.7 R31.1 104.038,39.538 104.038,58.403 C6.1 108.435,66.935 R33.2
  Bottom Layer w0.8: R7.2 21.778,30.251 7.751,30.251 5,27.5 5,23.82 8.577,20.244 100.794,20.244 J1.2 106.743,30.607 93.607,30.607 ; R19.2 31.643,83.643 38.1,83.643 38.935,82.808 38.935,82.088 DS11.1 ; DS7.1 40.708,62.8 VR1.3 49.642,61.207 62.593,61.207 62.976,61.59 68.269,61.59 U1.11 ; U3.11 71.44,78.25 71.44,78.899 72.195,79.654 84.754,79.654 R20.2 95.465,72.235 107.665,72.235 R33.2 ; G1.7 89.09,26.09 J3.1 93.607,30.607 ; R31.1 100.3,37.3 93.607,30.607
NetC5_1: C5.1 R26.1 U2.13 VR9.2 | length 114
  Top Layer w0.8: R26.1 83.363,73.363 83.363,30.912 87.681,26.594 96.723,26.594 108.43,38.301 C5.1
  Bottom Layer w0.8: U2.13 96.54,65.7 VR9.2 105.74,56.5 C5.1
NetC5_2: C5.2 R26.2 | length 34.5
  Bottom Layer w0.8: R26.2 97.902,74.498 110.109,74.498 112.827,71.78 112.827,58.357 C5.2
NetC6_2: C6.2 R24.1 U2.9 | length 32.9
  Top Layer w0.8: C6.2 112.395,61.38 112.395,50.895 R24.1
  Bottom Layer w0.8: U2.9 100.899,55.54 106.339,50.1 R24.1
NetD1_2: D1.2 R3.1 U1.3 | length 125.4
  Top Layer w0.8: D1.2 19.8,16.1 R3.1
  Bottom Layer w0.8: R3.1 21.98,28.016 30.836,28.016 37.49,34.671 41.732,34.671 44.094,37.033 77.013,37.033 86.512,36.449 88.036,37.973 88.036,40.056 74.828,53.264 70.875,53.264 U1.3
NetD2_2: D2.2 R7.1 U1.5 | length 129.4
  Top Layer w0.8: D2.2 19.8,36.16 R7.1 21.036,38.273 27.635,31.674 27.635,25.273 28.931,23.978 78.74,23.978 80.035,25.273 80.035,35.839 78.74,37.135 70.46,37.135 67.081,40.513 67.081,50.199 73.029,56.147 U1.5
NetD3_2: D3.2 R11.1 U1.10 | length 71.7
  Top Layer w0.8: v1(68.783,65.329) 71.51,65.329 U1.10
  Bottom Layer w0.8: D3.2 15.791,46.7 R11.1 35.359,66.269 67.843,66.269 v1(68.783,65.329)
NetD4_2: D4.2 R15.1 U3.3 | length 61.1
  Bottom Layer w0.8: D4.2 14.376,69.364 R15.1 21.092,68.072 67.31,68.072 68.16,68.922 U3.3
NetD5_2: D5.2 R19.1 U3.5 | length 102
  Top Layer w0.8: D5.2 19.8,83.9 R19.1 27.063,81.8 33.004,87.741 33.004,92.069 35.56,94.625 63.795,94.625 65.923,92.497 65.923,83.114 61.676,78.867 61.676,76.873 65.346,73.203 70.079,73.203 72.288,70.993 U3.5
NetD6_2: D6.2 R23.1 U3.10 | length 90.9
  Top Layer w0.8: D6.2 19.8,103.94 R23.1
  Bottom Layer w0.8: R23.1 27.94,86.097 27.94,80.772 30.48,78.232 43.078,78.232 44.425,79.578 49.251,79.578 54.483,74.346 71.653,74.346 73.24,75.932 U3.10
NetDS1_2: DS1.2 R1.1 | length 10.6
  Bottom Layer w0.8: DS1.2 40.483,41.9 R1.1
NetDS2_1: DS2.1 R2.1 | length 22.7
  Top Layer w0.8: DS2.1 10.54,22.795 R2.1
NetDS3_2: DS3.2 R4.1 | length 9.8
  Bottom Layer w0.8: DS3.2 38.426,48.6 R4.1
NetDS4_1: DS4.1 R6.1 | length 15.1
  Top Layer w0.8: DS4.1 10.54,35.231 R6.1
NetDS5_2: DS5.2 R9.1 | length 12.1
  Bottom Layer w0.8: DS5.2 40.14,59.072 42.417,59.072 R9.1
NetDS6_1: DS6.1 R10.1 | length 10.8
  Bottom Layer w0.8: DS6.1 15.973,53.1 R10.1
NetDS7_2: DS7.2 R12.1 | length 58.4
  Top Layer w0.8: DS7.2 35.204,65.764 35.204,91.313 36.551,92.659 41.783,92.659 43.129,91.313 43.129,73.16 R12.1
NetDS8_1: DS8.1 R14.1 | length 10.8
  Bottom Layer w0.8: DS8.1 16.146,66.8 R14.1
NetDS9_2: DS9.2 R16.1 | length 14.8
  Bottom Layer w0.8: DS9.2 38.758,70.968 42.494,70.968 45.689,74.163 R16.1
NetDS10_1: DS10.1 R18.1 | length 15
  Top Layer w0.8: DS10.1 19.8,77.44 R18.1
NetDS11_2: DS11.2 R21.1 | length 25.5
  Bottom Layer w0.8: DS11.2 36.64,80.861 37.465,80.035 40.64,80.035 43.51,82.906 43.51,85.674 44.45,86.614 53.875,86.614 R21.1
NetDS12_1: DS12.1 R22.1 | length 22.6
  Top Layer w0.8: DS12.1 10.44,97.378 R22.1
NetDS13_2: DS13.2 R63.2 | length 21.9
  Bottom Layer w0.8: DS13.2 40.719,94.679 52.91,94.679 R63.2
NetDS14_2: DS14.2 R64.2 | length 11.5
  Bottom Layer w0.8: DS14.2 39.953,32.614 43.203,32.614 R64.2
NetG1_1: G1.1 R1.2 U1.1 VR2.3 | length 55.9
  Top Layer w0.8: U1.1 59.893,53.214 59.893,46.104 R1.2 58.852,38.737 58.852,30.618 G1.1
  Bottom Layer w0.8: U1.1 62.869,54.378 65.432,51.814 69.699,51.814 73.874,47.64 VR2.3
NetG1_2: G1.2 R21.2 U3.8 VR7.3 | length 118.4
  Top Layer w0.8: U3.8 78.32,81.61 78.4,81.69 VR7.3
  Bottom Layer w0.8: R21.2 48.244,82.245 74.825,82.245 VR7.3 ; G1.2 65.92,27.16 67.31,28.55 81.636,28.55 90.246,37.16 90.246,44.679 82.245,52.68 82.245,73.585 U3.8
NetG1_3: G1.3 J1.1 | length 40.7
  Bottom Layer w0.8: G1.3 71.842,22.708 99.758,22.708 J1.1
NetJ2_1: J2.1 R17.2 U2.7 | length 83.2
  Bottom Layer w0.8: U2.7 92.558,47.422 111.76,47.422 114.637,50.299 114.637,80.513 J2.1 97.75,87.85 R17.2
NetJ2_2: J2.2 U2.14 | length 28.4
  Top Layer w0.8: U2.14 101.524,75.164 101.524,85.574 J2.2
NetR4_2: R4.2 U1.7 VR3.3 | length 30.5
  Top Layer w0.8: VR3.3 75.489,47.68 78.109,50.3 U1.7
  Bottom Layer w0.8: R4.2 56.569,49.48 68.3,49.48 VR3.3
NetR5_1: R5.1 U2.2 VR2.2 VR3.2 VR4.2 | length 57.7
  Top Layer w0.8: R5.1 90.184,42.684 90.184,52.208 90.58,52.604 90.58,62.749 88.369,64.96 87.72,64.96 U2.2
  Bottom Layer w0.8: VR4.2 VR3.2 73.965,45.14 74.005,45.1 VR2.2 79.2,45.1 R5.1
NetR5_2: R5.2 R13.2 U2.1 | length 62.4
  Top Layer w0.8: R5.2 92,42.3 92,51.184 92.431,51.615 92.431,64.709 88.9,68.24 U2.1 89.8,71.06 89.8,85.1 R13.2
NetR8_1: R8.1 U2.3 | length 20.3
  Top Layer w0.8: R8.1 88.384,47.684 88.384,54.407 88.78,54.803 88.78,61.36 U2.3
NetR9_2: R9.2 U1.8 VR4.3 | length 44.5
  Bottom Layer w0.8: VR4.3 60.99,47.68 59.385,46.076 54.585,46.076 53.797,46.863 53.797,53.508 R9.2 59.696,59.407 64.776,59.407 65.159,59.79 74.089,59.79 U1.8
NetR12_2: R12.2 U3.1 VR5.3 | length 26.1
  Top Layer w0.8: VR5.3 59.876,82.996 59.876,73.094 U3.1
  Bottom Layer w0.8: R12.2 56.399,69.89 U3.1
NetR13_1: R13.1 R17.1 U2.6 VR5.2 VR6.2 VR7.2 | length 63.2
  Top Layer w0.8: R13.1 R17.1 88,84.9 88,72.608 85.18,69.788 85.18,57.34 U2.6
  Bottom Layer w0.8: VR5.2 VR6.2 VR7.2 79.942,88.36 81.802,86.5 R17.1
NetR16_2: R16.2 U3.7 VR6.3 | length 56.8
  Top Layer w0.8: v1(65.888,79.223) 70.3,83.635 VR6.3 77.825,93.345 78.74,93.345 81.563,90.522 81.563,73.133 U3.7
  Bottom Layer w0.8: R16.2 57.212,79.223 v1(65.888,79.223)
NetR20_1: R20.1 U2.5 | length 32.6
  Top Layer w0.8: v1(91.694,70.46) 91.694,76.594 R20.1
  Bottom Layer w0.8: U2.5 85.963,58.08 85.115,58.928 85.115,69.596 85.979,70.46 v1(91.694,70.46)
NetR22_2: R22.2 R23.2 | length 6.2
  Top Layer w0.8: R22.2 R23.2
NetR24_2: R24.2 R34.2 U2.8 VR9.1 | length 27.5
  Top Layer w0.8: R34.2 101.8,46.888 101.6,47.088 R24.2 101.092,50.608 101.092,61.072 VR9.1
  Bottom Layer w0.8: U2.8 98.7,53 R24.2
NetR31_2: R31.2 R34.1 U2.10 | length 59.9
  Top Layer w0.8: U2.10 94.631,58.08 107.874,71.323 112.827,71.323 114.859,69.291 114.859,49.047 111.785,45.974 111.785,43.9 R34.1 R31.2
NetR33_1: R33.1 U2.12 | length 15.2
  Bottom Layer w0.8: U2.12 93.609,63.16 92.761,64.008 92.761,68.386 94.021,69.647 98.222,69.647 98.269,69.6 100.006,69.6 100.181,69.425 100.475,69.425 R33.1
NetR63_1: R63.1 R64.1 SW1.2 | length 77
  Top Layer w0.8: R63.1 47.489,90.1 47.489,64.304 46.736,63.551 46.736,59.665 47.193,59.207 47.193,54.432 47.1,54.339 SW1.2
  Bottom Layer w0.8: SW1.2 54.4,35.1 R64.1
NetU1_2: U1.2 U1.6 U1.9 U3.2 U3.6 U3.9 VR1.2 | length 65.1
  Top Layer w0.8: VR1.2 50.589,65.339 53.34,68.09 64.872,68.09 65.62,68.838 U3.2 ; U1.6 U1.9 75.703,63.944 75.703,64.439 75.78,64.516 U3.6 U3.9
  Bottom Layer w0.8: U1.2 66.56,57.99 73.769,57.99 U1.6 ; U3.2 67.067,71.69 73.98,71.69 U3.6
pads on no net: G1.4 G1.5 G1.6 G1.8 G1.9 G1.10 G1.11 G1.12 G1.13 U1.12 U1.13 U1.14 U3.12 U3.13 U3.14 VR2.1 VR3.1 VR4.1 VR5.1 VR6.1 VR7.1 VR9.3

## Polygon pours and split planes (outlines as drawn)
GND on Bottom Layer "GND_L02_P001" (solid, pour order 1): 0,119 0,-0.1 120.1,-0.1 120.1,119
GND on Top Layer "GND_L01_P002" (solid, pour order 2): 0,119 0,-0.1 120.1,-0.1 120.1,119